# Altium PCB traintrackr - Copy10.PcbDoc
Units mil, origin at the board's own origin, x right, y up, seen from the top; angles counter-clockwise.
Board outline 12000 x 4050 mil, 2 copper layers (Top Layer, Bottom Layer); 146 components, 38 nets, 352 pads, 105 vias.
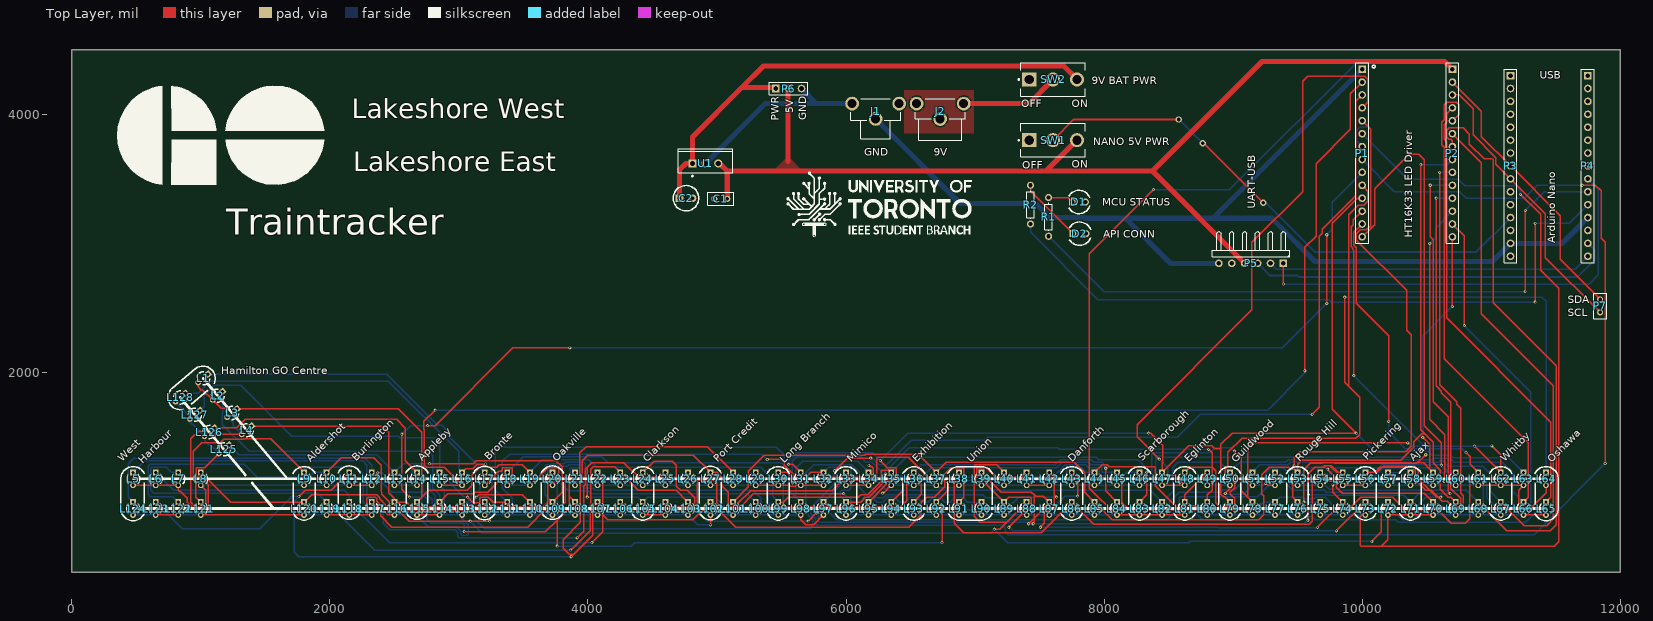
[diagram p0: Top Layer view]
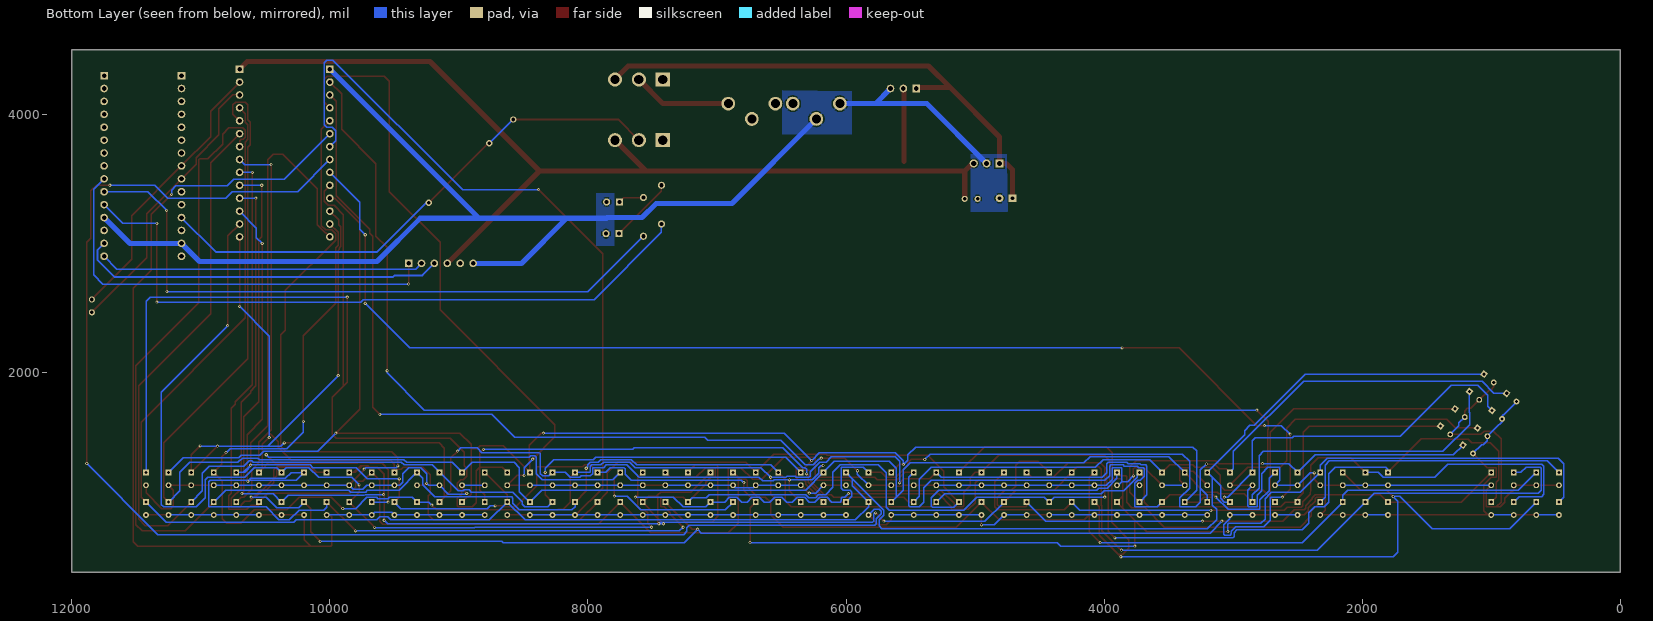
[diagram p1: Bottom Layer view, seen from below]

## Layer stack, top to bottom
Top Solder: solder mask 0.4, Solder Resist, Dk 3.5
Top Layer: signal copper 1.4
Dielectric 1: dielectric 12.6, FR-4, Dk 4.8
Bottom Layer: signal copper 1.4
Bottom Solder: solder mask 0.4, Solder Resist, Dk 3.5

## Board outline
0,450 0,4500 12000,4500 12000,450

## Design rules (kind name [scope] priority, off if disabled: settings)
Clearance [All] p1: gap=10 ignorepadtopadclearanceinfootprint=FALSE except(0: Arc-Hole Track-Hole SMDPad-Hole THPad-Hole Via-Hole Fill-Hole Poly-Hole Region-Hole Text-Hole)
HoleSize [All] p1: absolutevalues=TRUE maxlimit=900 minlimit=12 maxpercent=80.000 minpercent=20.000
MinimumSolderMaskSliver [All] p1: minsoldermaskwidth=1
PolygonConnect [All] p1: connectstyle=Relief reliefconductorwidth=15 reliefentries=4 polygonreliefangle="90 Angle" conductorbypadedge=TRUE mindistance=15 enablemindistance=FALSE airgapwidth=10
RoutingVias [All] p1: holewidth=12 width=24 viastyle="Through Hole" minholewidth=12 minwidth=24 maxholewidth=100 maxwidth=200
SilkToSilkClearance [All] p1: silktosilkclearance=0
SilkToSolderMaskClearance [IsPad] p1: minsilkscreentomaskgap=1 clearancetoexposedcopper=TRUE
SolderMaskExpansion [All] p1: expansion=4 istentingtop=FALSE
Width [All] p1: maxlimit=100 minlimit=6 preferedwidth=10 minimp=50.000000 maximp=50.000000 favimp=50.000000
26 further rules are at their usual default settings.

## Classes and differential pairs
net class C[7..0]: C0 C1 C2 C3 C4 C5 C6 C7
net class A[15..0]: A0 A1 A2 A3 A4 A5 A6 A7 A8 A9 A10 A11 A12 A13 A14 A15
component class traintrackr_schematic: C1 C2 D1 D2 J1 J2 P1 P2 P3 P4 P5 P6 P7 R1 R2 SW1 SW2 U1
component class led_matrix: L1 L2 L3 L4 L5 L6 L7 L8 L9 L10 L11 L12 L13 L14 L15 L16 L17 L18 L19 L20 L21 L22 L23 L24 L25 L26 L27 L28 L29 L30 L31 L32 L33 L34 L35 L36 L37 L38 L39 L40 L41 L42 L43 L44 L45 L46 L47 L48 L49 L50 L51 L52 L53 L54 L55 L56 L57 L58 L59 L60 L61 L62 L63 L64 L65 L66 L67 L68 L69 L70 L71 L72 L73 L74 L75 L76 L77 L78 L79 L80 L81 L82 L83 L84 L85 L86 L87 L88 L89 L90 L91 L92 L93 L94 L95 L96 L97 L98 L99 L100 L101 L102 L103 L104 L105 L106 L107 L108 L109 L110 L111 L112 L113 L114 L115 L116 L117 L118 L119 L120 L121 L122 L123 L124 L125 L126 L127 L128

## Components (designator, comment, footprint, x,y, rotation, side; value= is the part's Value field where it differs from the comment)
C1 "Cap" RAD-0.1 5030,3345 r0 top value=0.1UF
C2 "Cap Pol1" "Capacitor 330nF" 4710,3350 r0 top value=0.33uF
D1 "POWER" LED_5MM 7755,3320.78 r0 top
D2 "API CONNECTION" LED_5MM 7760,3075 r0 top
J1 "593 - GND" FP-593-MFG 6230,3965 r180 top
J2 "594 - 9V" FP-594-MFG 6730,3960 r180 top
L1 "HC" PCBComponent_1 1056.21,1985.96 r220 top
L2 "HC1" PCBComponent_1 1168.7,1851.9 r220 top
L3 "HC2" PCBComponent_1 1281.19,1717.84 r220 top
L4 "HC3" PCBComponent_1 1393.68,1583.78 r220 top
L5 "WH" PCBComponent_1 475,1225 r270 top
L6 "WH1" PCBComponent_1 650,1225 r270 top
L7 "WH2" PCBComponent_1 825,1225 r270 top
L8 "WH3" PCBComponent_1 1000,1225 r270 top
L9 "AS" PCBComponent_1 1800,1225 r270 top
L10 "AS1" PCBComponent_1 1975,1225 r270 top
L11 "BR" PCBComponent_1 2150,1225 r270 top
L12 "BR1" PCBComponent_1 2325,1225 r270 top
L13 "BR2" PCBComponent_1 2500,1225 r270 top
L14 "AB" PCBComponent_1 2675,1225 r270 top
L15 "AB1" PCBComponent_1 2850,1225 r270 top
L16 "AB2" PCBComponent_1 3025,1225 r270 top
L17 "BT" PCBComponent_1 3200,1225 r270 top
L18 "BT1" PCBComponent_1 3375,1225 r270 top
L19 "BT2" PCBComponent_1 3550,1225 r270 top
L20 "OK" PCBComponent_1 3725,1225 r270 top
L21 "OK1" PCBComponent_1 3900,1225 r270 top
L22 "OK2" PCBComponent_1 4075,1225 r270 top
L23 "OK3" PCBComponent_1 4250,1225 r270 top
L24 "CS" PCBComponent_1 4425,1225 r270 top
L25 "CS1" PCBComponent_1 4600,1225 r270 top
L26 "CS2" PCBComponent_1 4775,1225 r270 top
L27 "PC" PCBComponent_1 4950,1225 r270 top
L28 "PC1" PCBComponent_1 5125,1225 r270 top
L29 "PC2" PCBComponent_1 5300,1225 r270 top
L30 "LB" PCBComponent_1 5475,1225 r270 top
L31 "LB1" PCBComponent_1 5650,1225 r270 top
L32 "LB2" PCBComponent_1 5825,1225 r270 top
L33 "MM" PCBComponent_1 6000,1225 r270 top
L34 "MM1" PCBComponent_1 6175,1225 r270 top
L35 "MM2" PCBComponent_1 6350,1225 r270 top
L36 "EX" PCBComponent_1 6525,1225 r270 top
L37 "EX1" PCBComponent_1 6700,1225 r270 top
L38 "UN" PCBComponent_1 6875,1225 r270 top
L39 "UN" PCBComponent_1 7050,1225 r270 top
L40 "UN1" PCBComponent_1 7225,1225 r270 top
L41 "UN2" PCBComponent_1 7400,1225 r270 top
L42 "UN3" PCBComponent_1 7575,1225 r270 top
L43 "DN" PCBComponent_1 7750,1225 r270 top
L44 "DN1" PCBComponent_1 7925,1225 r270 top
L45 "DN2" PCBComponent_1 8100,1225 r270 top
L46 "SC" PCBComponent_1 8275,1225 r270 top
L47 "SC1" PCBComponent_1 8450,1225 r270 top
L48 "EG" PCBComponent_1 8625,1225 r270 top
L49 "EG1" PCBComponent_1 8800,1225 r270 top
L50 "GW" PCBComponent_1 8975,1225 r270 top
L51 "GW1" PCBComponent_1 9150,1225 r270 top
L52 "GW2" PCBComponent_1 9325,1225 r270 top
L53 "RH" PCBComponent_1 9500,1225 r270 top
L54 "RH1" PCBComponent_1 9675,1225 r270 top
L55 "RH2" PCBComponent_1 9850,1225 r270 top
L56 "PK" PCBComponent_1 10025,1225 r270 top
L57 "PK1" PCBComponent_1 10200,1225 r270 top
L58 "AJ" PCBComponent_1 10375,1225 r270 top
L59 "AJ1" PCBComponent_1 10550,1225 r270 top
L60 "AJ2" PCBComponent_1 10725,1225 r270 top
L61 "AJ3" PCBComponent_1 10900,1225 r270 top
L62 "WB" PCBComponent_1 11075,1225 r270 top
L63 "WB1" PCBComponent_1 11250,1225 r270 top
L64 "DCO" PCBComponent_1 11425,1225 r270 top
L65 "DCO" PCBComponent_1 11425,995 r270 top
L66 "DCO1" PCBComponent_1 11250,995 r270 top
L67 "WB" PCBComponent_1 11075,995 r270 top
L68 "WB1" PCBComponent_1 10900,995 r270 top
L69 "WB2" PCBComponent_1 10725,995 r270 top
L70 "WB3" PCBComponent_1 10550,995 r270 top
L71 "AJ" PCBComponent_1 10375,995 r270 top
L72 "AJ1" PCBComponent_1 10200,995 r270 top
L73 "PK" PCBComponent_1 10025,995 r270 top
L74 "PK1" PCBComponent_1 9850,995 r270 top
L75 "PK2" PCBComponent_1 9675,995 r270 top
L76 "RH" PCBComponent_1 9500,995 r270 top
L77 "RH1" PCBComponent_1 9325,995 r270 top
L78 "RH2" PCBComponent_1 9150,995 r270 top
L79 "GW" PCBComponent_1 8975,995 r270 top
L80 "GW1" PCBComponent_1 8800,995 r270 top
L81 "EG" PCBComponent_1 8625,995 r270 top
L82 "EG1" PCBComponent_1 8450,995 r270 top
L83 "SC" PCBComponent_1 8275,995 r270 top
L84 "SC1" PCBComponent_1 8100,995 r270 top
L85 "SC2" PCBComponent_1 7925,995 r270 top
L86 "DN" PCBComponent_1 7750,995 r270 top
L87 "DN1" PCBComponent_1 7575,995 r270 top
L88 "DN2" PCBComponent_1 7400,995 r270 top
L89 "DN3" PCBComponent_1 7225,995 r270 top
L90 "UN" PCBComponent_1 7050,995 r270 top
L91 "UN" PCBComponent_1 6875,995 r270 top
L92 "UN1" PCBComponent_1 6700,995 r270 top
L93 "EX" PCBComponent_1 6525,995 r270 top
L94 "EX1" PCBComponent_1 6350,995 r270 top
L95 "EX2" PCBComponent_1 6175,995 r270 top
L96 "MM" PCBComponent_1 6000,995 r270 top
L97 "MM1" PCBComponent_1 5825,995 r270 top
L98 "MM2" PCBComponent_1 5650,995 r270 top
L99 "LB" PCBComponent_1 5475,995 r270 top
L100 "LB1" PCBComponent_1 5300,995 r270 top
L101 "LB2" PCBComponent_1 5125,995 r270 top
L102 "PC" PCBComponent_1 4950,995 r270 top
L103 "PC1" PCBComponent_1 4775,995 r270 top
L104 "PC2" PCBComponent_1 4600,995 r270 top
L105 "CS" PCBComponent_1 4425,995 r270 top
L106 "CS1" PCBComponent_1 4250,995 r270 top
L107 "CS2" PCBComponent_1 4075,995 r270 top
L108 "CS3" PCBComponent_1 3900,995 r270 top
L109 "OK" PCBComponent_1 3725,995 r270 top
L110 "OK1" PCBComponent_1 3550,995 r270 top
L111 "OK2" PCBComponent_1 3375,995 r270 top
L112 "BT" PCBComponent_1 3200,995 r270 top
L113 "BT1" PCBComponent_1 3025,995 r270 top
L114 "BT2" PCBComponent_1 2850,995 r270 top
L115 "AB" PCBComponent_1 2675,995 r270 top
L116 "AB1" PCBComponent_1 2500,995 r270 top
L117 "AB2" PCBComponent_1 2325,995 r270 top
L118 "BR" PCBComponent_1 2150,995 r270 top
L119 "BR1" PCBComponent_1 1975,995 r270 top
L120 "AS" PCBComponent_1 1800,995 r270 top
L121 "AS-WH1" PCBComponent_1 1000,995 r270 top
L122 "AS-WH2" PCBComponent_1 825,995 r270 top
L123 "AS-WH3" PCBComponent_1 650,995 r270 top
L124 "WH" PCBComponent_1 475,995 r270 top
L125 "AS-HC1" PCBComponent_1 1217.49,1435.94 r220 top
L126 "AS-HC2" PCBComponent_1 1105,1570 r220 top
L127 "AS-HC3" PCBComponent_1 992.51,1704.06 r220 top
L128 "HC" PCBComponent_1 880.02,1838.12 r220 top
P1 "HT16K33 LEFT" HDR1X14 10000,4350 r270 top
P2 "HT16K33 RIGHT" HDR1X14 10700,4350 r270 top
P3 "NANO Vin side, USB side pin 1" HDR1X15 11150,4300 r270 top
P4 "NANO Tx1 side, USB side pin 1" HDR1X15 11750,4300 r270 top
P5 "UART - GND LEFT" HDR1X6H 9390,2845 r180 top
P6 "Extra Power" HDR1X3 5455,4200 r0 top
P7 "I2C" RAD-0.1 11845,2515 r270 top
R1 "Res1" AXIAL-0.3 7570,3205 r90 top value=100
R2 "Res1" AXIAL-0.3 7430,3300 r90 top value=100
SW1 "1101M2S3CQE2" FP-1101M2S3CQE2-MFG 7605,3800 r0 top
SW2 "1101M2S3CQE2" FP-1101M2S3CQE2-MFG 7605,4270 r0 top
U1 "LM340T-5.0" NDE0003A 4910,3620 r0 top

## Footprints (in the part's own frame and the unit in brackets; to place one, negate y for a bottom-side part, rotate by r counter-clockwise, add the part's x,y. Pads: shape width x height; smd on the part's side, far side on the other; paste and mask are expansions set on the pad)
AXIAL-0.3 [mm] "Axial Device, Thru-Hole; 2 Leads; 0.3 in Pin Spacing"
  round 1.4 hole 0.85: 1(-3.81,0) 2(3.81,0)
  silkscreen extent -2.77,-0.76 2.77,0.76
"Capacitor 330nF" [mil]
  rect 60x60 hole 30: 1(0,0)
  round 60 hole 30: 2(100,0)
  silkscreen extent -48,-98 148,98
FP-593-MFG [mm]
  round 2.72 hole 1.77 paste-1000 mask+0: 1(-4.635,-2.99) 1(0,0.01) 1(4.635,-2.99)
  silkscreen extent -4.95,-3.95 4.95,3.95, body extent -6.09,-4.45 6.09,4.05, height 0.25
FP-594-MFG [mm]
  round 2.72 hole 1.77 paste-1000 mask+0: 1(-4.635,-3.115) 1(0,-0.115) 1(4.635,-3.115)
  silkscreen extent -4.95,-4.08 4.95,4.08, body extent -6.09,-4.57 6.09,4.18, height 0.25
FP-1101M2S3CQE2-MFG [mm]
  rect 2.8x2.8 hole 1.85 paste-1000 mask+0: 1(-4.7,0)
  round 2.8 hole 1.85 paste-1000 mask+0: 2(0,0) 3(4.7,0)
  silkscreen extent -6.87,-3.3 6.35,3.3, body extent -6.45,-3.4 6.45,3.4, height 0.25
HDR1X3 [mm] "Connector; Header; 3 Position"
  rect 1.5x1.5 hole 0.9: 1(0,0)
  round 1.5 hole 0.9: 2(2.54,0) 3(5.08,0)
  silkscreen extent -1.27,-1.27 6.35,1.27
HDR1X6H [mm] "Connector; Header; 6 Position; Right Angle"
  rect 1.5x1.5 hole 0.9: 1(0,0)
  round 1.5 hole 0.9: 2(2.54,0) 3(5.08,0) 4(7.62,0) 5(10.16,0) 6(12.7,0)
  silkscreen extent -1.27,-6.35 13.97,-1.27
HDR1X14 [mm] "Connector; Header; 14 Position"
  rect 1.5x1.5 hole 0.9: 1(0,0)
  round 1.5 hole 0.9: 2(2.54,0) 3(5.08,0) 4(7.62,0) 5(10.16,0) 6(12.7,0) 7(15.24,0) 8(17.78,0) 9(20.32,0) 10(22.86,0) 11(25.4,0) 12(27.94,0) 13(30.48,0) 14(33.02,0)
  silkscreen extent -1.27,-1.27 34.29,1.27
HDR1X15 [mm] "Connector; Header; 15 Position"
  rect 1.5x1.5 hole 0.9: 1(0,0)
  round 1.5 hole 0.9: 2(2.54,0) 3(5.08,0) 4(7.62,0) 5(10.16,0) 6(12.7,0) 7(15.24,0) 8(17.78,0) 9(20.32,0) 10(22.86,0) 11(25.4,0) 12(27.94,0) 13(30.48,0) 14(33.02,0) 15(35.56,0)
  silkscreen extent -1.27,-1.27 36.83,1.27
LED_5MM [mil]
  rect 55x55 hole 30: 1(0,0)
  round 55 hole 30: 2(100,0)
  silkscreen extent -28,-91 135,91
NDE0003A [mm] "FM, 3-Leads, Body 10.7x4.7mm, Pitch 2.54mm"
  rect 1.6x1.6 hole 1: 1(-2.54,0)
  round 1.6 hole 1: 2(0,0) 3(2.54,0)
  silkscreen extent -5.35,-2.62 5.35,2.85, body extent -5.4,-1.9 5.4,2.9, height 19.4
PCBComponent_1 [mil]
  rect 45x45 hole 25: 1(0,0)
  round 45 hole 25: 2(100,0)
  silkscreen extent 14,-51 86,51
RAD-0.1 [mm] "Radial Cap, Thru-Hole; 2 Leads; 0.1 in Pin Spacing"
  round 1.2 hole 0.7: 1(-1.27,0) 2(1.27,0)
  silkscreen extent -2.54,-1.27 2.54,1.27

## Part data
C1: library part "CAP CER 0.1UF 50V X7R RADIAL", "Capacitor", Manufacturer Part Number=K104M15X7RF5TH5, Voltage Rating=50V, LatestRevisionDate=17-Jul-2002, LatestRevisionNote="Re-released for DXP Platform.", Published=8-Jun-2000, Publisher="Altium Limited"
C2: "Polarized Capacitor (Radial)", LatestRevisionDate=17-Jul-2002, LatestRevisionNote="Re-released for DXP Platform.", PackageDescription="Polarized Capacitor (Radial); 2 Leads", PackageReference=RB7.6-15, Published=8-Jun-2000, Publisher="Altium Limited"
D1 D2 L1 L2 L3 L4 L5 L6 L7 L8 L9 L10 L11 L12 L13 L14 L15 L16 L17 L18 L19 L20 L21 L22 L23 L24 L25 L26 L27 L28 L29 L30 L31 L32 L33 L34 L35 L36 L37 L38 L39 L40 L41 L42 L43 L44 L45 L46 L47 L48 L49 L50 L51 L52 L53 L54 L55 L56 L57 L58 L59 L60 L61 L62 L63 L64 L65 L66 L67 L68 L69 L70 L71 L72 L73 L74 L75 L76 L77 L78 L79 L80 L81 L82 L83 L84 L85 L86 L87 L88 L89 L90 L91 L92 L93 L94 L95 L96 L97 L98 L99 L100 L101 L102 L103 L104 L105 L106 L107 L108 L109 L110 L111 L112 L113 L114 L115 L116 L117 L118 L119 L120 L121 L122 L123 L124 L125 L126 L127 L128: library part LED1, "Typical RED GaAs LED", LatestRevisionDate=08-Jul-2005, LatestRevisionNote="Mech Layer 1 removed.", PackageDescription="LED; 2 Leads", PackageReference=LED-1, Published=8-Jun-2000, Publisher="Altium Limited"
J1: library part CMP-19636-000031-1, "BATTERY CONTACT SNAP 9V PC PIN", Package Quantity=100, Body Material=Steel, Body Plating=Tin, Connector Type="Snap in", Contact Material=Steel, Contact Plating=Nickel, Contact Type=Snap-In, Gender=Male, Lead Free="Lead Free", Length=9.65mm, Material=Steel, Material Thickness=0.15inch, Mount="Through Hole", Number of Batteries=1, Number of Cells=1, Orientation="Right Angle", Packaging=Bulk, Reach SVHC Compliant=Yes, RoHS Compliant=Yes, Series=-, Termination="PC Pin", Thickness=0.015inch
J2: library part CMP-19636-000029-1, "BATTERY CONTACT SNAP 9V PC PIN", Package Quantity=100, Body Material=Steel, Body Plating=Tin, Connector Type="Snap in", Contact Material=Steel, Contact Plating=Nickel, Contact Type=Snap-In, Gender=Female, Lead Free="Lead Free", Length=9.65mm, Material=Steel, Material Thickness=0.15inch, Mount="Through Hole", Number of Batteries=1, Number of Cells=1, Orientation="Right Angle", Packaging=Bulk, Reach SVHC Compliant=Yes, RoHS Compliant=Yes, Series=-, Termination="PC Pin", Thickness=0.015inch
P1 P2: library part "Header 14", "Header, 14-Pin", Supplier Part Number 1=S7012-ND, LatestRevisionDate=17-Jul-2002, LatestRevisionNote="Re-released for DXP Platform.", Publisher="Altium Limited", Supplier 1=Digi-Key
P3 P4: library part "Header 15", "Header, 15-Pin", Supplier Part Number 1=S7013-ND, LatestRevisionDate=17-Jul-2002, LatestRevisionNote="Re-released for DXP Platform.", Publisher="Altium Limited", Supplier 1=Digi-Key
P5: library part "Header 6H", "Header, 6-Pin, Right Angle", Supplier Part Number 1=S1111EC-06-ND, LatestRevisionDate=17-Jul-2002, LatestRevisionNote="Re-released for DXP Platform.", Publisher="Altium Limited", Supplier 1=Digi-Key
P6: library part "Header 3", "Header, 3-Pin", Supplier Part Number 1=2057-PH1-20-UA-ND, LatestRevisionDate=17-Jul-2002, LatestRevisionNote="Re-released for DXP Platform.", Publisher="Altium Limited", Supplier 1=Digi-Key
P7: library part "Header 2H", "Header, 2-Pin, Right Angle", Supplier Part Number 1=2057-PH1-20-UA-ND, LatestRevisionDate=17-Jul-2002, LatestRevisionNote="Re-released for DXP Platform.", Publisher="Altium Limited", Supplier 1=Digi-Key
R1 R2: "Resistor", LatestRevisionDate=17-Jul-2002, LatestRevisionNote="Re-released for DXP Platform.", PackageDescription="Axial Device, Thru-Hole; 2 Leads; 0.3 in Pin Spacing", PackageReference=AXIAL-0.3, Published=8-Jun-2000, Publisher="Altium Limited"
SW1 SW2: library part CMP-10038-000019-1, "SWITCH SLIDE SPDT 6A 120V", Actuator Color=Black, Contact Current Rating=6A, Contact Resistance=10mR, Flammability Rating="UL94 V-0", Insulation Resistance=1GR, Max Operating Temperature=65°C, Max Voltage Rating (AC)=250V, Max Voltage Rating (DC)=28V, Min Operating Temperature=-30°C, Package Quantity=1, Voltage Rating (AC)=120V, Actuator Length=5.08mm, Actuator Material=Nylon, Actuator Type=Standard, Approvals=UL, Body Material="Stainless Steel", Contact Material=Copper, Contact Plating=Silver, Current Rating=6A, Depth=6.6mm, Electrical Life=40000Cycles, Housing Material="Stainless Steel", Lead Free="Lead Free", Length=12.7mm, Max Current Rating=6A, Mount="Through Hole", Number of Poles=1, Number of Positions=3, Orientation=Vertical, Packaging=Bulk, REACH SVHC="No SVHC", Series=1000, Switch Function=On-On, Switch Travel=2.16mm, Termination="PC Pins", Throw Configuration=SPDT, Voltage Rating (DC)=28V
U1: library part CMP-0062-02468-3, "Series 3-Terminal Positive Regulators, 3-pin TO-220", Manufacturer="Texas Instruments", PackageTopMarking="NSUZXYTTE#*LM340T5*7805 P+", PowerWise=N, ComponentLink1Description="Datasheet URL", ComponentLink1URL=http://www.ti.com/general/docs/lit/getliterature.tsp?genericPartNumber=LM340-N&fileType=pdf, CompType="LDO IC", PackageDescription="TO-220, Molded, 3 Lead, Straight", PackageReference=NDE0003A, PinCount=3, RoHS=N

## Via types
v1: diameter 24, hole 12, Top Layer to Bottom Layer, 102 vias
v2: diameter 50, hole 28, Top Layer to Bottom Layer, 3 vias

## Nets (pads, with @x,y where several pads share a name; then routed paths per layer and width w, separated by ;. In a path a pad name is that pad's centre, name@x,y a point inside that pad or via, vN(x,y) a via of type N, cw(c..) or ccw(c..) an arc to the next point about the centre after c; other vN are vias at no path point)
+5: C1.2 P2.1 P5.4 P6.2 SW1.3 U1.3 | length 8232
  Top Layer w10: U1.3 U1.3@5020,3620
  Top Layer w40: U1.3@5020,3620 5080,3560 ; C1.2 5080,3560 ; 5550,3635 P6.2@5550,4210 ; SW1.3 7550.04,3560 ; P5.4 8375,3560 ; P2.1 10640.47,4409.53 9224.53,4409.53 8375,3560 ; 5080,3560 7550.04,3560 ; 7550.04,3560 8375,3560
A0: L1.1 L17.1 L33.1 L49.1 L65.1 L81.1 L97.1 L113.1 P2.4 | length 16212
  Top Layer w10: L81.1 8625,1050 L49.1 ; P2.4 10655,4005 10655,3939.53 10635.47,3920 10635.47,3805 10655,3785.47 10655,2423 11463,1615 11463,1033 L65.1
  Bottom Layer w10: L1.1 2439.04,1985.96 2835.86,1589.14 2869.87,1589.14 2909.65,1549.36 2909.65,1515.35 L17.1 3161,1186 ; L113.1 3067.5,995 3096.5,1024 3096.5,1121.5 3161,1186 ; L33.1 5950,1175 ; L65.1 11267.5,837.5 10279.6,837.5 10260.1,857 9637.49,857 9612.83,881.66 9553.16,881.66 9528.5,857 8763,857 L81.1 8487,857 5928,857 5825,960 L97.1 5950,1120 5950,1175 ; 3161,1186 3161,970 3128.5,937.5 3128.5,859.5 3200,788 5722,788 5744,810 5744,856.04 5707.5,892.54 5707.5,932.5 5950,1175
A1: L2.1 L18.1 L34.1 L50.1 L66.1 L82.1 L98.1 L114.1 P2.5 | length 15766.9
  Top Layer w10: L114.1 2915,1060 3110,1060 3122.5,1072.5 3222.5,1072.5 L18.1 ; P2.5 10752,4002 10752,4074 10731,4095 10656,4095 10635,4074 10635,3959.53 10615.47,3940 10615.47,3765.47 10635,3745.94 10635,2107 11288,1454 11288,1033 L66.1
  Bottom Layer w10: L2.1 1168.7,1690.7 1167,1689 1167,1596 1376,1387 2765,1387 2799,1353 2799,1103.5 2850,1052.5 L114.1 ; L18.1 3497.5,1347.5 4107.5,1347.5 4157,1298 5503.82,1298 5558,1243.82 5558,1087 5612,1033 ; L98.1 5612,1033 ; L66.1 11163,1082 11163,1225 11085.5,1302.5 10714.36,1302.5 10698.86,1318 10693.86,1318 10676,1335.86 10557.36,1335.86 10544.5,1323 9426,1323 9405.5,1302.5 9052.5,1302.5 L50.1 8898,1302 8572,1302 8530.62,1260.62 8530.62,1075.62 L82.1 8358,1087 6313,1087 L34.1 6090,1310 5664,1310 5612,1258 5612,1033
A2: L3.1 L19.1 L35.1 L51.1 L67.1 L83.1 L99.1 L115.1 P2.6 | length 15640.9
  Top Layer w10: L3.1 2531.85,1717.84 2713,1536.7 2713,1033 ; L115.1 2713,1033 ; L19.1 3492.5,1282.5 3314.3,1282.5 3294.8,1263 3162,1263 3100,1201 3100,1120 3065,1085 2765,1085 2713,1033 ; L99.1 5513,995 5551,1033 6093.61,1033 6113.11,1052.5 6166.84,1052.5 6272.5,1158.16 6272.5,1232 6281.5,1241 6334,1241 L35.1 ; L83.1 8331,1051 v1(8331,1225) ; P2.6 10925,3625 10925,2456 11483,1898 11483,864 11431,812 11258,812 L67.1
  Bottom Layer w10: L19.1 3647.5,1322.5 4007.97,1322.5 4067.47,1263 5338,1263 5431,1170 5431,1039 L99.1 ; L35.1 6467.5,1342.5 7938.93,1342.5 7958.93,1322.5 8265.5,1322.5 8331,1257 v1(8331,1225) ; L83.1 8313,957 8488,957 8508.7,977.7 8508.7,997.06 8584.14,1072.5 8905,1072.5 8921.5,1089 8959,1089 8966.15,1081.85 9006.85,1081.85 L51.1 9207.5,1282.5 9425.5,1282.5 9446,1303 9501.43,1303 9501.93,1302.5 10593.5,1302.5 10606,1315 10626,1315 10668.19,1272.81 10934.19,1272.81 10988,1219 10988,1082 L67.1
A3: L4.1 L20.1 L36.1 L52.1 L68.1 L84.1 L100.1 L116.1 P2.7 | length 15641.4
  Top Layer w10: L4.1 2409.22,1583.78 2457,1536 2457,1068.63 2500,1025.63 L116.1 2594.14,995 2632.14,957 3652,957 3687,992 3687,1187 L20.1 ; L100.1 5337.5,957.5 6422.5,957.5 6470,1005 6470,1170 L36.1 ; v1(8013,1257) 8013,1082 L84.1 ; P2.7 10700,3793.47 10688,3805.47 10672,3805.47 10655.47,3822 10655.47,3876.47 10674,3895 10784,3895 10832,3847 10832,3770 10945,3657 11009.14,3657 11015,3651.14 11015,2540 11503,2052 11503,821 11456,774 11121,774 L68.1
  Bottom Layer w10: L20.1 3742.5,1207.5 3742.5,1188.82 3848.81,1082.51 3998.49,1082.51 4022,1059 5236,1059 L100.1 ; L36.1 6582.5,1282.5 7622.48,1282.5 7662.48,1322.5 7898.93,1322.5 7918.93,1302.5 7984,1302.5 8002.5,1284 8002.5,1267.5 v1(8013,1257) ; L84.1 8100,960 8126,934 8531,934 8582,985 8582,1026 8591,1035 9185.41,1035 9280.97,1130.55 9280.97,1180.97 L52.1 9463,1087 9708.97,1087 9723.47,1072.5 9840.08,1072.5 9854.58,1087 10808,1087 L68.1
A4: L5.1 L21.1 L37.1 L53.1 L69.1 L85.1 L101.1 L117.1 P2.8 | length 15495.4
  Top Layer w10: L117.1 2393.13,926.87 2393.13,887.63 2479.06,801.7 3532.7,801.7 3682,951 3784,951 3825,992 3825,1189.43 3832.66,1197.1 3872.1,1197.1 L21.1 ; L101.1 5242,1112 5242,1234 5365.78,1357.78 6146.8,1357.78 6153.02,1364 6561,1364 L37.1 6777.5,1302.5 7768.5,1302.5 7849,1222 7849,1071 L85.1 8063,857 9199,857 9237,895 9237,1043.5 9223,1057.5 9223,1206 9280,1263 9431.83,1263 9446,1248.83 9476.17,1248.83 L53.1 9500,1288.1 9529.9,1318 10300.28,1318 10401,1418.72 10401,1464.18 10461.31,1524.49 10483.67,1524.49 ; 10455,1554.58 10484.38,1525.2 10552,1457.58 10552,1296.86 10554.29,1294.57 10607,1241.86 10607,1093.73 10667.73,1033 10687,1033 L69.1 ; 10455,1555.58 v1(10455,3610)
  Bottom Layer w10: L5.1 564,1314 2253,1314 2287,1280 2287,1033 L117.1 ; L21.1 3900,1179 3976.49,1102.51 4042,1102.51 4057.51,1087 5280,1087 5338,1029 5338,964.36 5328,954.36 5165.64,954.36 L101.1 ; v1(10455,3610) 10660,3610 P2.8
A5: L6.1 L22.1 L38.1 L54.1 L70.1 L86.1 L102.1 L118.1 P2.9 | length 15201.4
  Top Layer w10: v1(4030,681) 4113,764 4113,896 ; L22.1 4113,1187 4113,896 ; L38.1 6837,1187 ; v1(10601,3550) 10601,1904.5 10734.72,1770.78 10734.72,1751.28 10763,1723 10763,1063.93 10782.5,1044.43 10782.5,937.5 10643.5,937.5 10611,970 10550,970 L70.1 10482.14,1062.86 9845.41,1062.86 9800,1108.26 9800,1147 9792,1155 9745,1155 L54.1 9615,1165 9615,848 9592,825 7920,825 L86.1 7512,757 6911,757 6837,831 6837,1187 ; 4113,896 4152,857 4812,857 L102.1 5145,800 6487,800 6583,896 6583,992 6624,1033 6683,1033 6765,1115 6765,1162 6776,1173 6823,1173 6837,1187
  Bottom Layer w10: L6.1 790,1085 2112,1085 2150,1047 L118.1 2464,681 v1(4030,681) ; v1(10601,3550) P2.9
A6: L7.1 L23.1 L39.1 L55.1 L71.1 L87.1 L103.1 L119.1 P2.10 | length 16237.8
  Top Layer w10: v1(3865,622) 4017.5,774.5 4017.5,967.25 4022,971.75 4022,1248 4041,1267 4208,1267 L23.1 4388,1087 4683,1087 L103.1 ; v1(5706,847) v1(5770,911) ; L39.1 7202,1073 7437,1073 7457.5,1052.5 ; v1(7415,827) 7457.5,869.5 ; v1(7450,827) 7457.5,834.5 7457.5,869.5 ; v1(9580,854) 9580,1213 9583,1213 ; v1(9583,1052.5) 9583,1213 ; L55.1 9815.1,1225 ; v1(10528,3450) 10528,3050 10551,3027 10551,1773.78 10667,1657.78 10667,1075 v1(10682,1060) ; 7457.5,869.5 7457.5,1052.5 ; 7457.5,869.5 7515.64,927.64 7515.64,935.64 L87.1 7529,1041 7469,1041 7457.5,1052.5 ; 9583,1213 9583,1216 9632,1265 9695.1,1265 ; 9695.1,1265 9708.1,1265 9721.1,1278 ; 9695.1,1265 9708.1,1278 9721.1,1278 ; 9721.1,1278 9749,1278 ; 9749,1278 9762.1,1278 9815.1,1225 ; 9749,1278 9802,1225 9815.1,1225
  Bottom Layer w10: L7.1 770,1225 730,1265 621,1265 612,1256 612,1088 635,1065 1905,1065 L119.1 2348,622 v1(3865,622) ; L103.1 4923,847 v1(5706,847) ; v1(5770,911) 5779.75,911 5786.69,904.06 5786.69,846.31 5796.35,836.65 7440.35,836.65 v1(7450,827) ; v1(7415,827) v1(7450,827) ; v1(9580,854) 9553,827 v1(7450,827) ; v1(9583,1052.5) 9726.95,1052.5 9732.5,1046.95 10323.05,1046.95 L71.1 10440,1060 v1(10682,1060) ; v1(10528,3450) P2.10
A7: L8.1 L24.1 L40.1 L56.1 L72.1 L88.1 L104.1 L120.1 P2.11 | length 18224.8
  Top Layer w10: L8.1 1230,995 L120.1 1858,1053 2361.78,1053 2385.67,1029.12 2385.67,1020 2437.33,968.34 2437.33,945.67 2448,935 2527,935 2615,847 v1(3087,847) v1(3238,847) ; L24.1 4513,1313 4653,1313 4686,1280 4686,1119 4718,1087 4768,1087 4827,1028 4827,976 4808,957 4608,957 4600,965 L104.1 ; v1(7150,785) 7190,785 7244,839 ; L40.1 7167.5,1282.5 7003,1282.5 6992.5,1272 6992.5,884 7037.5,839 7244,839 ; L88.1 7244,839 ; L56.1 10100,1225 ; v1(10075,690) 10150,765 10150,945 L72.1 ; v1(10574,3350) 10574,1895 10597,1872 10597,1870 10614,1853 10614,1842 10687,1769 10687,1099.5 10762.5,1024 10762.5,957.5 10696,957.5 10687.5,966 10687.5,976 10661.5,1002 10620,1002 10589,1033 ; v1(10611,1033) 10589,1033 ; 10100,1225 10113,1225 10151,1263 ; 10100,1225 10138,1263 10151,1263 ; 10151,1263 10413,1263 10413,1198 10434.29,1176.71 ; 10151,1263 10162,1274 10405,1274 10434.29,1244.71 10434.29,1176.71 ; 10434.29,1176.71 10524,1087 ; 10434.29,1176.71 10434.29,1145.71 10493,1087 10524,1087 ; 10524,1087 10578,1033 10589,1033 ; 10524,1087 10535,1087 10589,1033
  Bottom Layer w10: v1(3087,847) 3179,755 7120,755 v1(7150,785) 7254,681 8658.11,681 8667.11,690 v1(10075,690) ; v1(3238,847) 4452,847 L104.1 ; L72.1 10242.5,952.5 10411.5,952.5 10492,1033 v1(10611,1033) ; v1(10574,3350) P2.11
A8: L9.1 L25.1 L41.1 L57.1 L73.1 L89.1 L105.1 L121.1 P2.12 | length 18206.7
  Top Layer w10: L121.1 962,1033 962,1146.75 942.5,1166.25 942.5,1388.5 1008,1454 1149,1454 1177.64,1482.64 1254.81,1482.64 1255.44,1482 1332.61,1482 1335.6,1485 1540,1485 L9.1 ; v1(3916,718) 3968,770 3968,1118.38 3977.5,1127.88 3977.5,1248 3993.5,1264 ; v1(3995,1034) 3995,1262.5 3993.5,1264 ; L25.1 4561,1186 4392,1186 4278.5,1299.5 4032,1299.5 4030.5,1298 4029,1299.5 3993.5,1264 ; v1(7262,800) 7362,900 7362,912 7407.5,957.5 7437.5,957.5 7437.5,1024 7429,1032.5 7262.5,1032.5 L89.1 7088,1132 7088,1147 7047.5,1187.5 7012.5,1187.5 7012.5,1262.5 7087.5,1262.5 7164,1186 7361,1186 L41.1 ; v1(9801,771) L73.1 ; v1(10524,3000) 10524,1636 10641.5,1518.5 10641.5,1160.5 v1(10636,1155)
  Bottom Layer w10: L9.1 1800,1248 1817,1265 2208,1265 2257,1216 2257,992 2292,957 2368,957 2412,913 2412,832 2464,780 2971,780 2992.87,758.13 2992.87,728 3002.87,718 v1(3916,718) ; v1(3995,1034) 3996,1033 4387,1033 L105.1 4463,1033 4988,1033 5088,933 5664,933 5687.5,956.5 5687.5,1222.5 5750.09,1285.09 6045.41,1285.09 6103,1227.5 6103,1108 6158.5,1052.5 6213.25,1052.5 6235.75,1030 6290.5,1030 6313,1052.5 7058.71,1052.5 7081.21,1030 7190,1030 L89.1 ; v1(7262,800) 7291,771 v1(9801,771) ; L73.1 10025,956 10048,933 10238,933 10313.5,857.5 10394.5,857.5 10494,957 10938,957 10938,1153 10928,1163 v1@10628,1163 ; v1(10524,3000) 10569,3045 10569,3119 P2.12 ; v1(10636,1155) v1@10628,1163 ; v1@10628,1163 10613.14,1177.86 10346.14,1177.86 10300.25,1223.75 10227,1223.75 10225.75,1225 L57.1 10262,1163 v1@10628,1163
A9: L10.1 L26.1 L42.1 L58.1 L74.1 L90.1 L106.1 L122.1 P2.13 | length 16181.3
  Top Layer w10: L10.1 2089,1339 2339,1339 2398,1280 2398,1077 2402.5,1072.5 2402.5,1055.5 2462,996 2462,965 2472,955 2581,955 2603,933 3087.52,933 3090.52,930 v1(3172.52,930) ; L106.1 4308,937 4824,937 4847,960 4847,1153 4835,1165 ; L26.1 4835,1165 ; v1(5981,1060) 5282,1060 5182.5,960.5 5182.5,937.5 5051.5,937.5 4998,991 4998,1143 4976,1165 4835,1165 ; v1(7506,800) 7537,831 7537,912 7558,933 7586,933 7613,960 7613,1052 ; L42.1 7613,1187 7613,1052 ; v1(7632,1033) 7613,1052 ; v1(9654,799) L74.1 9773,1072 v1(9773,1128) ; P2.13 10792,3058 v1(10792,2362)
  Bottom Layer w10: L122.1 782,1038 608,1038 592,1054 592,1271 608,1287 1338,1287 1438,1187 1838,1187 1876,1225 L10.1 ; v1(3172.52,930) 3175.02,932.5 4187.5,932.5 L106.1 ; v1(5981,1060) 6008.5,1032.5 6028.71,1032.5 6037.5,1023.71 6037.5,1003.5 6046,995 6108.79,995 6146.29,1032.5 6150.22,1032.5 6203.71,1032.5 6241.21,995 6283.79,995 6321.29,1032.5 6378.71,1032.5 6416.21,995 6458.79,995 6496.29,1032.5 6553.71,1032.5 6591.21,995 6633.79,995 6671.29,1032.5 6728.71,1032.5 6766.21,995 6808.79,995 6846.29,1032.5 6903.71,1032.5 6941.21,995 L90.1 7088,957 7263,957 7339,1033 v1(7632,1033) ; v1(7506,800) 7507,799 8876,799 8877.5,797.5 9652.5,797.5 v1(9654,799) ; v1(9773,1128) 9832,1187 10087,1187 10162.5,1262.5 10337.5,1262.5 L58.1 10412.5,1262.5 10585.5,1262.5 10661,1187 10947,1187 10966,1168 10966,1027 11036,957 11288,957 11307,976 11307,1847 v1(10792,2362)
A10: L11.1 L27.1 L43.1 L59.1 L75.1 L91.1 L107.1 L123.1 P2.14 | length 17934
  Top Layer w10: v1(1760,1038) 1809.5,1087.5 2012.5,1087.5 L11.1 ; v1(3870,571) 3891,592 ; L107.1 4037.5,957.5 4037.5,738.5 3891,592 ; L91.1 6912.5,1032.5 6912.5,1254 6904,1262.5 6814.5,1262.5 6724,1172 6653.5,1172 6481.5,1344 6248,1344 6240,1336 6240,1181.26 6222.24,1163.5 5971.5,1163.5 5892,1084 5262,1084 5162.5,984.5 5162.5,957.5 5096,957.5 5087.5,966 5087.5,1071 5038,1120.5 5038,1184 4997,1225 L27.1 4815.5,1359.5 4000,1359.5 3957.5,1317 3957.5,1163.38 3942,1147.88 3942,837 3808,703 3808,639 3855,592 3891,592 ; L43.1 7795,1180 v1(7795,1041) ; v1(9548,995) 9548,1246 9596,1294 ; v1(10470,1495) 10472,1495 10525,1442 10525,1250 ; v1(10493,1362) 10429,1298 ; L59.1 10525,1250 ; v1(10700,2511) P2.14 ; 9596,1294 9600,1298 9692.1,1298 ; 9596,1294 9688.1,1294 9692.1,1298 ; 9692.1,1298 9782.1,1298 ; 9782.1,1298 9786.1,1294 10425,1294 10429,1298 ; 9782.1,1298 10429,1298 ; 10429,1298 10477,1298 10525,1250
  Bottom Layer w10: L123.1 857,788 1456,788 1708,1040 1758,1040 v1(1760,1038) ; v1@1760,1040 v1(1760,1038) ; v1(3870,571) 1760,571 1724,607 1724,1002 v1(1760,1038) ; L91.1 6936,934 7590,934 7697,1041 v1(7795,1041) ; L43.1 7807.5,1167.5 8352.28,1167.5 8400.78,1216 8400.78,1344 8412.17,1355.4 8441.88,1355.4 8454.28,1343 10474,1343 v1(10493,1362) ; v1(9548,995) L75.1 ; v1(10470,1495) 10470,2281 v1(10700,2511)
A11: L12.1 L28.1 L44.1 L60.1 L76.1 L92.1 L108.1 L124.1 P1.14 | length 17983
  Top Layer w10: v1(3041,766) 3671,766 3761,856 ; v1(3761,654) 3761,856 ; L28.1 4926.5,1423.5 3985,1423.5 3937.5,1376 3937.5,1192.5 3920,1175 3872,1175 3855,1158 3855,1149 ; v1(6744,681) 6744,951 L92.1 6792,1087 v1(6792,1146) ; L44.1 7984,1284 8025,1284 8040,1269 8391,1269 8398,1262 8398,1120 8561,957 8655.19,957 8663.19,965 v1(8720,965) ; v1(9462,1175) 9462,1033 L76.1 ; P1.14 10031.56,3081.56 10037.49,3081.56 10098.48,3142.55 10098.48,3424.48 10364,3690 10440,3690 10482,3648 10482,1585 10614,1453 v1(10614,1282) ; 3761,856 3854,949 ; 3854,949 L108.1 3855,1040 3855,1149 ; 3854,949 3854,1149 3855,1149
  Bottom Layer w10: L124.1 437,1033 437,1291 480,1334 2272,1334 2325,1281 L12.1 2480.78,1069.22 2706,1069.22 2732.5,1042.72 2732.5,1040.03 2751,1021.53 2751,862 2784,829 3033.38,829 3041,821.38 v1(3041,766) ; v1(3761,654) 4336,654 4363,681 v1(6744,681) ; v1(6792,1146) 6811,1165 7665,1165 7712.5,1212.5 7712.5,1253.71 7721.29,1262.5 7825.75,1262.5 7863.25,1225 L44.1 ; v1(8720,965) 8758.96,965 8778.96,945 9426,945 9427,944 9449,944 L76.1 ; v1(9462,1175) 9709.19,1175 9796.69,1262.5 10132.5,1262.5 10152.5,1282.5 10604,1282.5 10661.5,1225 10671,1225 ; v1(10614,1282) 10671,1225 ; L60.1 10671,1225
A12: L13.1 L29.1 L45.1 L61.1 L77.1 L93.1 L109.1 L125.1 P1.13 | length 14697
  Top Layer w10: v1(2772,1293) 3111.06,1293 3135.06,1317 3752,1317 3799.25,1269.75 3799.25,1069.25 L109.1 ; L29.1 5350,1175 5554,1175 v1(5585,1144) ; L93.1 6584,1054 v1(6584,1187) ; L45.1 8138,1187 8138,992 8190,940 8230,940 8235,935 9173,935 v1(9210,972) ; v1(9900,945) 9988,1033 10238,1033 10335,936 10585,936 10689,832 10799,832 10833,866 10833,1158 L61.1 10837,1288 10837,1346 v1(10805,1378) ; P1.13 9935.47,3085.47 9935.47,2985.47 9955,2965.94 9955,2534 10205,2284 v1(10205,1620)
  Bottom Layer w10: L125.1 1292.43,1361 2364,1361 L13.1 2568,1293 v1(2772,1293) ; L109.1 3667.5,1052.5 3667.5,1272 3678,1282.5 3713,1282.5 3722.5,1292 3812,1292 3822.5,1302.5 3968,1302.5 3977.5,1293 3977.5,1222.5 4013,1187 5262,1187 L29.1 ; v1(5585,1144) 5585,1312 5619,1346 6112.43,1346 6153.02,1305.41 6201.59,1305.41 6278,1229 6278,1197 6288,1187 6384.5,1187 6394,1196.5 6456.5,1196.5 6466,1187 v1(6584,1187) 6659.5,1262.5 7634.75,1262.5 7674.75,1302.5 7878.93,1302.5 7898.93,1282.5 7972,1282.5 7982.5,1272 7982.5,1227.5 7985,1225 L45.1 ; v1(9210,972) 9233,995 L77.1 9363,1033 9538,1033 9549,1022 9627.5,1022 9638,1032.5 9713,1032.5 9800.5,945 v1(9900,945) ; v1(10205,1620) 10205,1536.88 10332.88,1409 10774,1409 v1(10805,1378)
A13: L14.1 L30.1 L46.1 L62.1 L78.1 L94.1 L110.1 L126.1 P1.12 | length 15717.1
  Top Layer w10: L126.1 1280,1570 1345,1635 2518,1635 2585,1568 2585,1315 L14.1 ; v1(3134,1033) 3153.5,1052.5 3492.5,1052.5 L110.1 ; L30.1 5543.5,1225 5601,1167.5 5756.5,1167.5 5776,1187 6213,1187 6213,1262.5 6206.65,1262.5 6200.48,1268.66 6190.84,1268.66 6181.09,1278.41 v1(6177.3,1278.41) ; L94.1 6439,1084 v1(6439,1167) ; v1(9010,1390) 9062.34,1337.66 9062.34,1082.66 9112,1033 ; L78.1 9112,1033 ; v1(9935,1975) 9935,2944.91 9927.84,2952.06 9927.84,2963.63 9915.47,2976 9915.47,3127.9 9931.57,3144 9931.57,3181.57 P1.12 ; v1(10353.85,1454) 9152,1454 9112,1414 9112,1033 ; v1(10871,1429) L62.1 11075,1360 v1(11005,1430)
  Bottom Layer w10: L14.1 2721,1179 2721,1083 2792.5,1011.5 2792.5,937.5 3038.5,937.5 v1(3134,1033) ; L110.1 3588,957 3763,957 3763,1140.03 3738.77,1164.27 3719.23,1164.27 3687.5,1196 3687.5,1254 3696,1262.5 3733,1262.5 3742.5,1272 3842.5,1272 3853,1282.5 3947,1282.5 3957.5,1272 3957.5,1200.03 3994.53,1163 5338,1163 5396,1105 5396,992 5431,957 5504,957 5513,966 5513,1187 L30.1 ; v1(6177.3,1278.41) 6179.98,1275.73 6194.41,1275.73 6207.15,1263 6213,1263 6213,1217.42 6263.42,1167 v1(6439,1167) 6555,1167 6563,1159 6647,1159 6675,1187 7602,1187 7602.5,1187.5 7603.71,1187.5 7612.5,1196.29 7612.5,1197.5 7697.5,1282.5 7858,1282.5 7878,1262.5 7962.5,1262.5 7962.5,1216 7980.5,1198 8051.5,1198 8062,1187.5 8138,1187.5 8175.5,1225 L46.1 8302,1198 8352,1198 8370,1216 8370,1371.48 8375.86,1377.34 8597.85,1377.34 8599.19,1376 8821.18,1376 8859.59,1414.41 8985.59,1414.41 v1(9010,1390) ; v1(9935,1975) 10481,1429 ; v1(10353.85,1454) 10378.85,1429 10481,1429 ; v1(11005,1430) 11004.5,1429.5 10871.5,1429.5 v1(10871,1429) 10481,1429
A14: L15.1 L31.1 L47.1 L63.1 L79.1 L95.1 L111.1 L127.1 P1.11 | length 15411.7
  Top Layer w10: v1(3067,1033) 3111.5,988.5 3162.5,988.5 3162.5,1024 3171,1032.5 3229,1032.5 3264,997.5 3264,995 L111.1 ; v1(5555,1285) 5557.68,1287.68 5576.68,1287.68 5577,1288 5587,1288 L31.1 ; L95.1 6312.5,1132.5 6312.5,1152 6323,1162.5 6368,1162.5 6387.5,1182 6387.5,1262.5 6321.5,1262.5 v1(6267,1317) ; v1(8345,1530) 8346.59,1528.41 8361.59,1528.41 8455,1435 8455,1301.4 8450,1296.4 L47.1 8657,1432 8834.18,1432 8856.18,1410 8905,1410 ; L79.1 8935,1035 8926,1035 8905,1056 8905,1410 ; P1.11 9961.3,3350 9767.49,3156.19 9767.49,1715.51 v1(9953,1530) 8992,1530 8905,1443 8905,1410
  Bottom Layer w10: L127.1 1026,1737.55 1026,1821 1105,1900 1309,1900 1704,1505 2531,1505 2542.76,1493.24 2828.76,1493.24 2850,1472 L15.1 3042,1033 v1(3067,1033) ; L111.1 3283,1087 3283,1392 3312,1421 5460.11,1421 5519.97,1361.13 5519.97,1320.03 v1(5555,1285) 5555,1314 5617,1376 6208,1376 v1(6267,1317) 6480,1530 v1(8345,1530) ; v1(9953,1530) 10094,1389 10512,1389 10544,1357 10687,1357 10706,1338 11137,1338 L63.1
A15: L16.1 L32.1 L48.1 L64.1 L80.1 L96.1 L112.1 L128.1 P1.10 | length 18378.3
  Top Layer w10: L16.1 3054,1254 3109,1254 3142,1287 v1@3203,1287 ; v1(3206,1290) v1@3203,1287 ; v1@3209,1290 3206,1287 v1@3203,1287 ; v1(5390,1325) 5495,1325 5521,1299 5521,1280 5613.5,1187.5 5687.5,1187.5 5725,1225 L32.1 ; L96.1 6114,995 6137,1018 6137,1024 6145.5,1032.5 6175.13,1032.5 6292.5,1149.87 6292.5,1201.5 v1(6305,1214) ; L48.1 8663,1263 8838,1263 ; L80.1 8800,1050 8838,1088 8838,1263 ; v1(8810,1403) 8812,1403 8838,1377 8838,1263 ; v1(9865,2584) 9865,1922 9895.47,1891.53 ; P1.10 10045,3405 10045,3328 10011.53,3294.53 9968,3294.53 9895.47,3222 9895.47,1891.53 ; 8838,1263 8864,1237 8864,989 8896,957 9003.21,957 9012.5,966.29 9012.5,1023.71 8979.84,1056.37 8979.84,1074.56 9012.5,1107.22 9012.5,1140.53 8984.62,1168.41 8965.38,1168.41 8937.5,1196.29 8937.5,1253.71 8960,1276.21 8960,1380 9069,1489 9952,1489 9980,1517 9980,1807 9895.47,1891.53
  Bottom Layer w10: L128.1 979.02,1838.12 1070.91,1930 2454,1930 2997,1387 2997,1253 L16.1 ; L112.1 3200,1049 3255,1104 ; v1@3209,1290 3255,1244 3255,1104 ; 3255.5,1104.5 3255,1104 ; v1(5390,1325) 5347.5,1367.5 3392.5,1367.5 3337,1312 3337,1104 3413,1028 3413,957 3290,957 3255,992 3255,1104 ; L32.1 5865.09,1265.09 6034.91,1265.09 6037.5,1262.5 6037.5,1104 6020.5,1087 5968,1087 5954,1073 5954,1041 L96.1 ; v1(6305,1214) 6305,1247.5 6320,1262.5 6335,1262.5 6488.5,1416 7641.86,1416 7652.86,1405 8808,1405 v1(8810,1403) ; v1(9865,2584) 11392,2584 11425,2551 L64.1
C0: L1.2 L2.2 L3.2 L4.2 L5.2 L6.2 L7.2 L8.2 L9.2 L10.2 L11.2 L12.2 L13.2 L14.2 L15.2 L16.2 P1.2 | length 15312.2
  Top Layer w10: L5.2 L6.2 L7.2 825,1088 839,1074 843,1074 893,1024 893,992 928,957 960,957 ; L1.2 979.61,1888 1004.61,1863 1016.72,1863 L2.2 1158.72,1721 1184,1721 1204.59,1700.41 L3.2 ; L8.2 1038,1087 1038,957 960,957 ; L4.2 1079.5,1519.5 1055,1544 982,1544 922.5,1484.5 922.5,994.5 960,957 ; L11.2 L12.2 2371,1171 v1(2371,1221) ; v1(2815.52,1707) 2729.04,1620.52 2729.04,1560.66 2733,1556.7 2733,1280 2750,1263 2887,1263 L16.2 L15.2 ; v1(9556,2013) 9556,2968 9643.74,3055.74 9643.74,3618.74 9909,3884 9909,4159 P1.2
  Bottom Layer w10: L8.2 L9.2 L10.2 L11.2 ; L3.2 1250,1608.15 1250,1586.58 L4.2 ; v1(2371,1221) 2404,1221 L13.2 L14.2 2637,1163 2637,1263 2732,1263 2779,1216 2779,1083 2812.5,1049.5 2812.5,957.5 2880,957.5 2888,965.5 2888,1087 L15.2 ; v1(2815.52,1707) 9267,1707 9555.41,1995.41 9555.41,2012.41 v1(9556,2013)
C1: L17.2 L18.2 L19.2 L20.2 L21.2 L22.2 L23.2 L24.2 L25.2 L26.2 L27.2 L28.2 L29.2 L30.2 L31.2 L32.2 P1.3 | length 10098.1
  Top Layer w10: L17.2 3309,1234 3328,1234 3337.5,1243.5 3337.5,1262.5 3412.5,1262.5 3412.5,1162.5 L18.2 ; L19.2 3687.5,1262.5 3762.5,1262.5 3772.25,1252.75 v1(3772.25,1197.25) 3770.25,1195.25 3770.25,1170.25 L20.2 ; L29.2 L30.2 5562,1125 5570,1117 5605,1117 5613,1125 L31.2 L32.2 ; v1(5911,1238) 6009,1336 v1(6192.15,1336) ; v1(9613,1675) 9667,1729 9667,3056 9691,3080 9691,3107.98 9952,3368.98 9952,4102 P1.3
  Bottom Layer w10: L18.2 L19.2 ; v1(3772.25,1197.25) 3816.5,1153 3862,1153 ; L21.2 3890,1125 3862,1153 ; L29.2 L28.2 L27.2 L26.2 L25.2 L24.2 L23.2 L22.2 3982.29,1125 3937.5,1169.79 3937.5,1262.5 3862,1262.5 3862,1153 ; L32.2 5911,1211 v1(5911,1238) ; v1(6192.15,1336) 6195.94,1336 6206.52,1325.41 6209.87,1325.41 6252.29,1283 6317,1283 6507,1473 7073,1473 7096,1496 8567,1496 8746,1675 v1(9613,1675)
C2: L33.2 L34.2 L35.2 L36.2 L37.2 L38.2 L39.2 L40.2 L41.2 L42.2 L43.2 L44.2 L45.2 L46.2 L47.2 L48.2 P1.4 | length 7308.3
  Top Layer w10: L33.2 L34.2 ; v1(6285,1065) 6287.5,1065 6347.5,1125 L35.2 ; L41.2 L42.2 ; v1(8428,1328) 8256,1500 8256,1595 9145,2484 9145,3007 9539,3401 9539,4256 9578,4295 10022,4295 10045,4272 10045,4095 P1.4 ; L47.2 L48.2 8548,1202 v1(8495,1202)
  Bottom Layer w10: L34.2 6235,1065 v1(6285,1065) ; L35.2 L36.2 L37.2 6718,1107 6857,1107 L38.2 L39.2 L40.2 L41.2 ; L42.2 L43.2 L44.2 L45.2 L46.2 L47.2 ; v1(8428,1328) 8495,1261 v1(8495,1202)
C3: L49.2 L50.2 L51.2 L52.2 L53.2 L54.2 L55.2 L56.2 L57.2 L58.2 L59.2 L60.2 L61.2 L62.2 L63.2 L64.2 P1.5 | length 7830.9
  Top Layer w10: v1(8939,1062) 8975,1098 L50.2 ; v1(9250,1140) 9253.79,1140 9268.79,1125 L52.2 ; v1(9473,1276) 9473,1338 9519,1384 10338,1384 10381,1427 10381,2290 10346,2325 10346,2635 9955.47,3025.53 9955.47,3074.47 9986,3105 10032,3105 10065,3138 10065,3885 P1.5 ; v1(9735,1251) 9735,1244 9854,1125 L56.2 ; L61.2 L62.2 L63.2 11212,1087 11212,965 11232,945 11302,945 11425,1068 L64.2
  Bottom Layer w10: L49.2 L50.2 ; v1(8939,1062) 8944,1057 9082,1057 L51.2 9235,1125 v1(9250,1140) 9249,1141 9249,1216 9295.5,1262.5 9388.5,1262.5 9435,1216 9435,1148 9458,1125 L53.2 L54.2 9713.5,1125 9746,1092.5 9817.5,1092.5 L55.2 L56.2 L57.2 L58.2 L59.2 L60.2 L61.2 ; v1(9473,1276) 9486.5,1262.5 9723.5,1262.5 v1(9735,1251)
C4: L65.2 L66.2 L67.2 L68.2 L69.2 L70.2 L71.2 L72.2 L73.2 L74.2 L75.2 L76.2 L77.2 L78.2 L79.2 L80.2 P1.6 | length 8806
  Top Layer w10: L73.2 10000,895 9987,882 9987,876 9984,873 9984,662 9992,654 10150,654 ; L70.2 L71.2 L72.2 10200,704 10150,654 ; v1(11227,3380) 11383,3224 11383,2791 11523,2651 11523,689 11488,654 10150,654 ; L66.2 L65.2
  Bottom Layer w10: L80.2 L79.2 L78.2 L77.2 L76.2 9522,917 9653,917 L75.2 L74.2 L73.2 ; P1.6 10355,3495 10745,3495 10795,3445 11195,3445 11227,3413 v1(11227,3380) ; L70.2 L69.2 L68.2 L67.2 L66.2
C5: L81.2 L82.2 L83.2 L84.2 L85.2 L86.2 L87.2 L88.2 L89.2 L90.2 L91.2 L92.2 L93.2 L94.2 L95.2 L96.2 P1.7 | length 8610.1
  Top Layer w10: v1(8382,3416) 7887,2921 7887,1104 8096,895 L84.2 L83.2 L82.2 L81.2
  Bottom Layer w10: L96.2 L95.2 L94.2 L93.2 L92.2 L91.2 L90.2 L89.2 L88.2 L87.2 L86.2 L85.2 L84.2 L83.2 L82.2 ; v1(8382,3416) 8972,3416 9977,4421 10024,4421 10045,4400 10045,3920 10025,3900 9983,3900 9955,3872 9955,3795 P1.7
C6: L97.2 L98.2 L99.2 L100.2 L101.2 L102.2 L103.2 L104.2 L105.2 L106.2 L107.2 L108.2 L109.2 L110.2 L111.2 L112.2 P1.8 | length 13608.5
  Top Layer w10: L105.2 L104.2 ; v1(4950,818) L102.2 ; L98.2 5650,858 5688,820 5750,820 L97.2 ; v1(11705,3450) 11808,3450 11852,3406 11852,3040 11884,3008 v1(11884,1294)
  Bottom Layer w10: L112.2 L111.2 L110.2 L109.2 L108.2 L107.2 L106.2 L105.2 ; L104.2 L103.2 4852,818 v1(4950,818) ; L102.2 L101.2 L100.2 L99.2 L98.2 ; L97.2 5782,938 5744,938 5728,922 5728,903 5766,865 5766,827 5778.39,814.61 7214.39,814.61 7233,796 7233,768 7258,743 11333,743 v1(11884,1294) ; P1.8 10250,3400 10756,3400 10806,3350 11256,3350 11356,3450 v1(11705,3450)
C7: L113.2 L114.2 L115.2 L116.2 L117.2 L118.2 L119.2 L120.2 L121.2 L122.2 L123.2 L124.2 L125.2 L126.2 L127.2 L128.2 P1.9 | length 14124.5
  Top Layer w10: L123.2 L122.2 ; L121.2 1025,895 ; L125.2 1031.72,1262.5 962.5,1262.5 962.5,1187.5 1000,1187.5 1058,1129.5 1058,928 1025,895 ; L120.2 1025,895 ; L119.2 L118.2 L117.2 2287,933 2287,1024 2296,1033 2353.5,1033 2362.5,1024 2362.5,1003 2416,949.5 2416,926 2447,895 L116.2 ; v1(2558,1521) 2558,1093 v1(2618,1033) ; L115.2 L114.2 ; v1(2757,1588) 2816,1588 3418,2190 v1(3860,2190) ; v1(9726,2535) v1(9726,3067)
  Bottom Layer w10: L124.2 L123.2 ; L128.2 904.26,1673 906.91,1673 915.91,1664 L127.2 915.91,1617.09 960,1573 961.12,1573 L126.2 1028.4,1472 1061.4,1439 1073.55,1439 L125.2 ; L122.2 L121.2 ; L120.2 L119.2 ; L116.2 L115.2 ; v1(2558,1521) 2625,1588 v1(2757,1588) ; v1(2618,1033) 2704,1033 2713,1024 2713,854 2762.97,804.03 2977.97,804.03 3014,768 3014,749 3024,739 3065,739 3072,746 3072,820 3025,867 L113.2 L114.2 ; v1(3860,2190) 9381,2190 v1(9726,2535) ; v1(9726,3067) 9767,3108 9767,3317 P1.9
DTR: P4.9 P5.1 | length 3407.1
  Top Layer w10: v1(9390,2685) P5.1
  Bottom Layer w10: v1(9390,2685) 11760,2685 11830,2755 11830,3420 P4.9
GND: C1.1 C2.2 D1.2 D2.2 J1.1 P1.1 P3.14 P4.12 P5.6 P6.3 U1.2 | length 10116.8
  Bottom Layer w10: 7850,3200 7855,3195
  Bottom Layer w40: U1.2 5372.72,4082.72 5772.28,4082.72 ; P6.3 5772.28,4082.72 ; J1.1@6047.52,4082.72 5772.28,4082.72 ; J1.1@6230,3964.61 6884.61,3310 7470,3310 7580,3200 7850,3200 ; 7855,3195 8165,3195 ; P5.6 8515,2845 8165,3195 ; P1.1 8845,3195 ; P4.12 11550,3000 P3.14 11010,2860 9635,2860 9300,3195 8845,3195 ; 8165,3195 8845,3195
LED1: P4.10 R1.1 | length 5045.2
  Top Layer w10: v1@11260,2625 11265,2630 v1(11265,3255)
  Bottom Layer w10: R1.1 8000,2625 v1@11260,2625 ; v1(11265,3255) 11410,3400 P4.10
  other v1: 11262.5,2627.5
LED2: P4.11 R2.1 | length 5281.4
  Top Layer w10: v1(11340,2545) v1(11340,3155)
  Bottom Layer w10: R2.1 7430,3085 7952.37,2562.63 9740.47,2562.63 9761.26,2541.83 10547.15,2541.83 10550.32,2545 v1(11340,2545) ; v1(11340,3155) 11605,3155 P4.11
NetC2_1: C2.1 P6.1 SW2.3 U1.1 | length 4064.3
  Top Layer w10: SW2.3 SW2.3@7790.04,4272.84
  Top Layer w40: C2.1 4710,3570 4760,3620 U1.1 4810,3825 5192.5,4207.5 ; P6.1 5447.5,4207.5 5192.5,4207.5 ; SW2.3@7790.04,4272.84 7687.88,4375 5360,4375 5192.5,4207.5
NetD1_1: D1.1 R1.2 | length 199.2
  Top Layer w10: R1.2 7720.78,3355 D1.1
NetD2_1: D2.1 R2.2 | length 511.7
  Top Layer w10: R2.2 7430,3405 D2.1
NetJ2_1: J2.1 SW2.2 | length 770.1
  Top Layer w40: J2.1@6912.48,4082.64 7417.64,4082.64 SW2.2
NetP3_12: P3.12 SW1.2 | length 4146.7
  Top Layer w15: SW1.2 7765,3960 v2(8580,3960) ; v2(8765,3775) 8772.5,3775 v2(9232.5,3315)
  Bottom Layer w15: v2(8580,3960) v2(8765,3775) ; v2(9232.5,3315) 9253.08,3315 9634.42,2933.66 10883.66,2933.66 P3.12
RX: P4.14 P5.3 | length 2858.1
  Bottom Layer w15: P5.3 9283,2752 9497,2752 9509,2740 11670,2740 11800,2870 11800,2950 P4.14
SCL: P2.3 P3.9 P7.2 | length 2189.9
  Top Layer w10: P2.3 10752.21,4150 10860,4042.21 10860,3840.28 11035,3665.28 11035,3615 11420,3230 11420,2890 P7.2
SDA: P2.2 P3.8 P7.1 | length 2159.3
  Top Layer w10: P2.2 10925,4025 10925,3825 P3.8 11535,3215 11535,2875 P7.1
TX: P4.15 P5.2 | length 2519.7
  Bottom Layer w10: P5.2 9334.53,2800.47 11650.47,2800.47 P4.15
pads on no net: P3.1 P3.2 P3.3 P3.4 P3.5 P3.6 P3.7 P3.10 P3.11 P3.13 P3.15 P4.1 P4.2 P4.3 P4.4 P4.5 P4.6 P4.7 P4.8 P4.13 P5.5 SW1.1 SW2.1

## Polygon pours and split planes (outlines as drawn)
+5 on Top Layer "+5_L01_P003" (solid, pour order 3): 5530,3655 5440,3565 5475,3565 5650,3565 5655,3570 5570,3655
NetJ2_1 on Top Layer "NETJ2_1_L01_P000" (solid, pour order 0): 6450,4185 6990,4185 6990,3855 6450,3855
GND on Bottom Layer "GND_L02_P004" (solid, pour order 4): 7795,3390 7935,3390 7935,2980 7795,2980
GND on Bottom Layer "GND_L02_P002" (solid, pour order 2): 4752.42,3690 5035,3690 5035,3245 4747.42,3245
GND on Bottom Layer "GND_L02_P001" (solid, pour order 1): 6495,4185 6495,3845 5955,3845 5955,4180

## Silkscreen, mask and mechanical layers (free items; w line width, h text height)
Top Overlay:
  drawing of 149 lines, arcs and shapes, not listed
  text "USB" at 11375,4275 h60
  text "9V BAT PWR" at 7905,4235 h60
  text "OFF" at 7360,4055 h60
  text "ON" at 7750,4055 h60
  text "5V" at 5590,4010 h60 r90
  text "Lakeshore West" at 2170,3970 h150
  text "GND" at 5690,3955 h60 r90
  text "PWR" at 5480,3950 h60 r90
  text "NANO 5V PWR" at 7915,3760 h60
  text "GND" at 6140,3680 h60
  text "9V" at 6680,3680 h60
  text "ON" at 7750,3585 h60
  text "OFF" at 7365,3580 h60
  text "Lakeshore East" at 2180,3560 h150
  text "MCU STATUS" at 7985,3290 h60
  text "UART-USB" at 9170,3270 h60 r90
  text "Traintracker" at 1195,3065 h200
  text "API CONN" at 7995,3045 h60
  text "HT16K33 LED Driver" at 10390,3045 h60 r90
  text "Arduino Nano" at 11495,3000 h60 r90
  text "SDA" at 11595,2535 h60
  text "SCL" at 11595,2435 h60
  text "Hamilton GO Centre" at 1160,1985 h60
  text "Bronte" at 3230,1314.14 h60 r45
  text "Pickering" at 10040.86,1313.28 h60 r45
  text "Burlington" at 2205.86,1308.28 h60 r45
  text "Appleby" at 2715.86,1308.28 h60 r45
  text "Scarborough" at 8295.86,1308.28 h60 r45
  text "Ajax" at 10400.86,1308.28 h60 r45
  text "West" at 390,1304.14 h60 r45
  text "Oakville" at 3760,1304.14 h60 r45
  text "Rouge Hill" at 9515.86,1303.28 h60 r45
  text "Whitby" at 11105.86,1303.28 h60 r45
  text "Aldershot" at 1850,1299.14 h60 r45
  text "Clarkson" at 4460,1299.14 h60 r45
  text "Port Credit" at 5005,1299.14 h60 r45
  text "Mimico" at 6040,1299.14 h60 r45
  text "Exhibition" at 6550,1299.14 h60 r45
  text "Danforth" at 7755,1299.14 h60 r45
  text "Eglinton" at 8655.86,1298.28 h60 r45
  text "Union" at 6970,1294.14 h60 r45
  text "Guildwood" at 9020,1294.14 h60 r45
  text "Oshawa" at 11470,1294.14 h60 r45
  text "Long Branch" at 5520.86,1293.28 h60 r45
  text "Harbour" at 550,1289.14 h60 r45
Mechanical 1:
  lines w10: 6050,2069.92 6050,3940 ; 0,450 12000,450 12000,4500 0,4500 0,450

## Dimensions
6230,3964.61 to 6730,3964.53 on Mechanical 1
5010,3620 to 12000,4500 on Mechanical 1
9440,2945 to 9950,3000 on Mechanical 1
9440,2945 to 12000,4500 on Mechanical 1
10700,4350 to 12000,4500 on Mechanical 1
10700,4350 to 11150,4300 on Mechanical 1
10000,4350 to 10700,4350 on Mechanical 1
11750,4300 to 12000,4500 on Mechanical 1
11750,4300 to 12000,4500 on Mechanical 1
11150,4300 to 11750,4300 on Mechanical 1